# Altium PCB S6_Main.PcbDoc
Units mm, origin at the board's own origin, x right, y up, seen from the top; angles counter-clockwise.
Board outline 75 x 64 mm, 2 copper layers (Top Layer, Bottom Layer); 124 components, 72 nets, 429 pads, 238 vias.
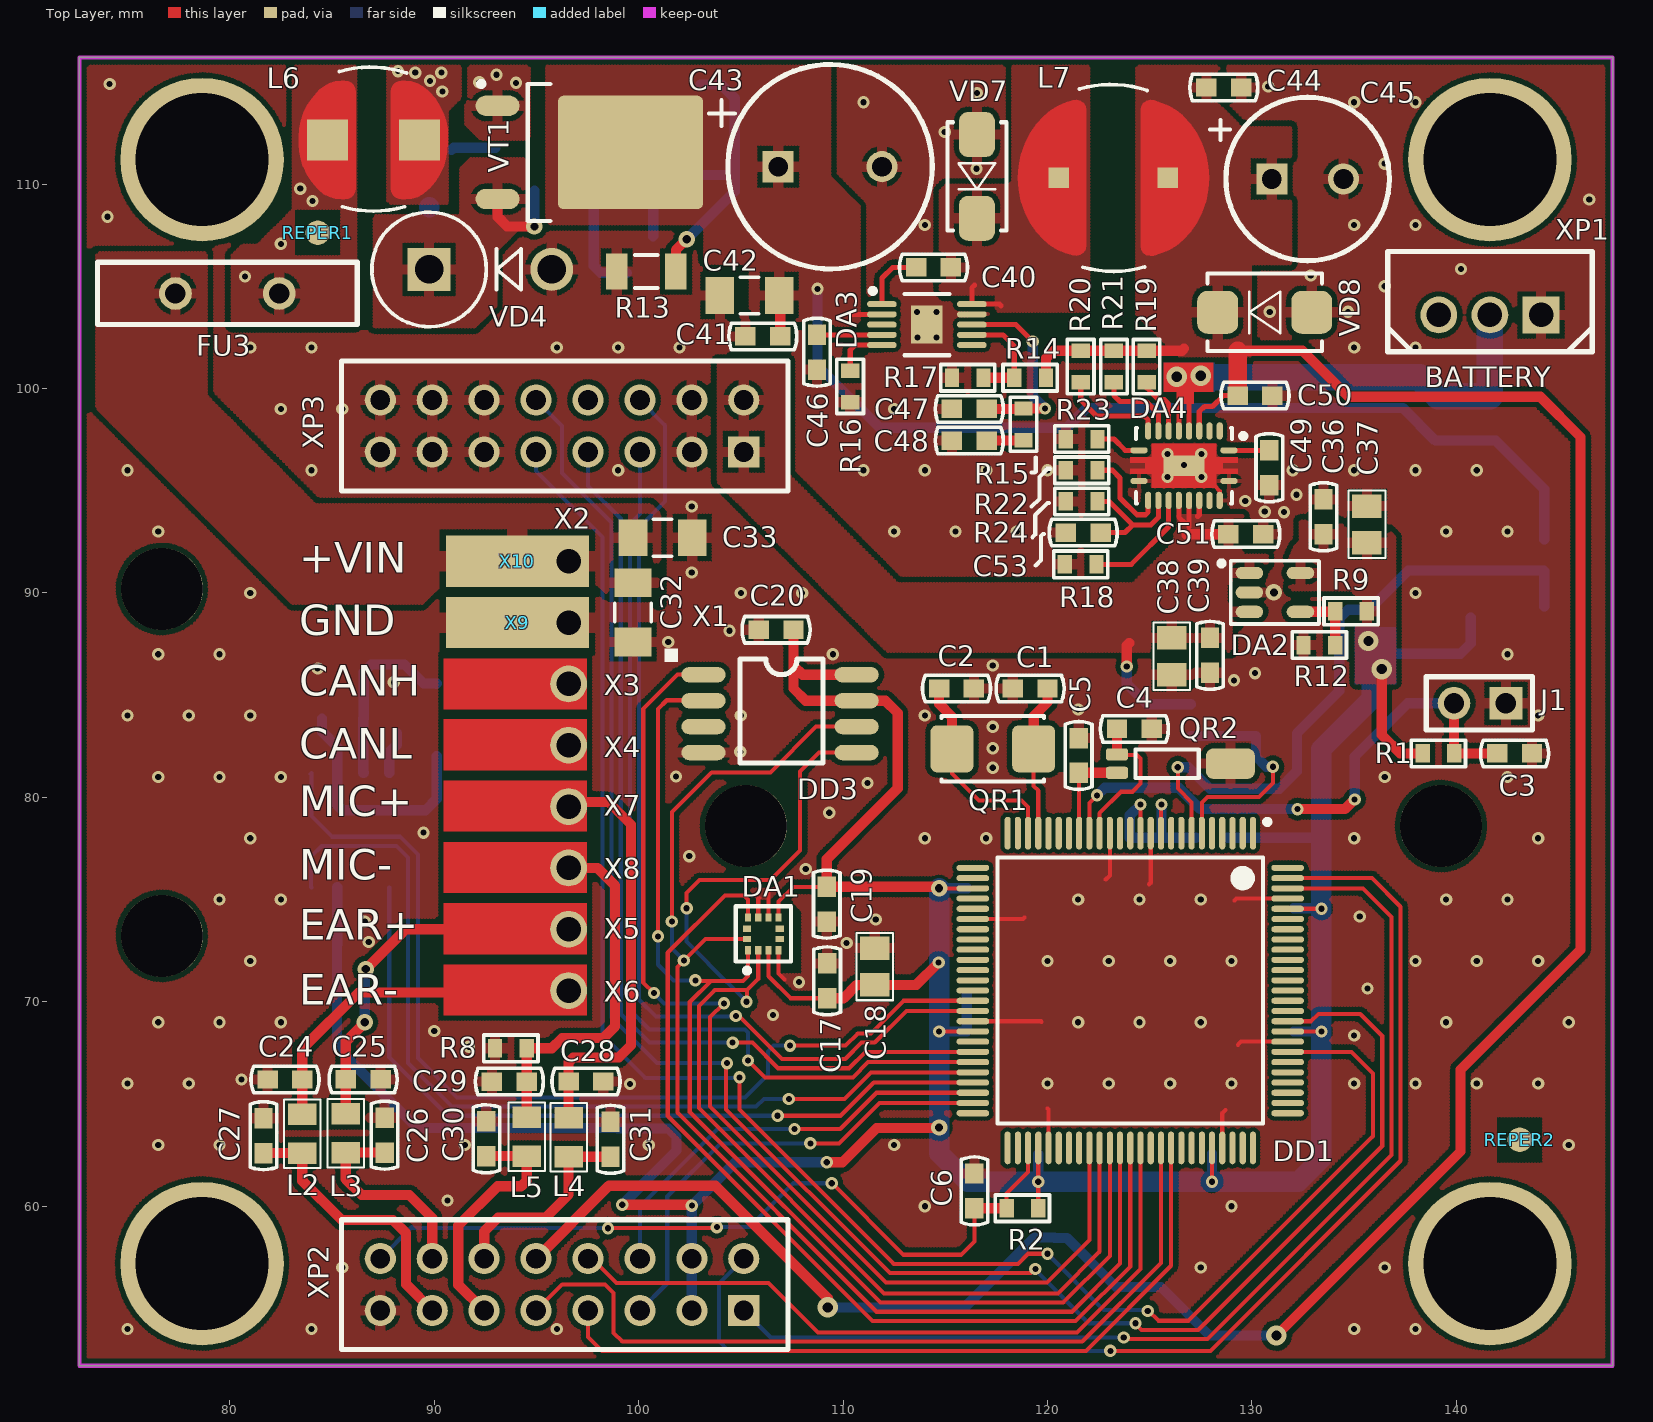
[diagram p0: Top Layer view]
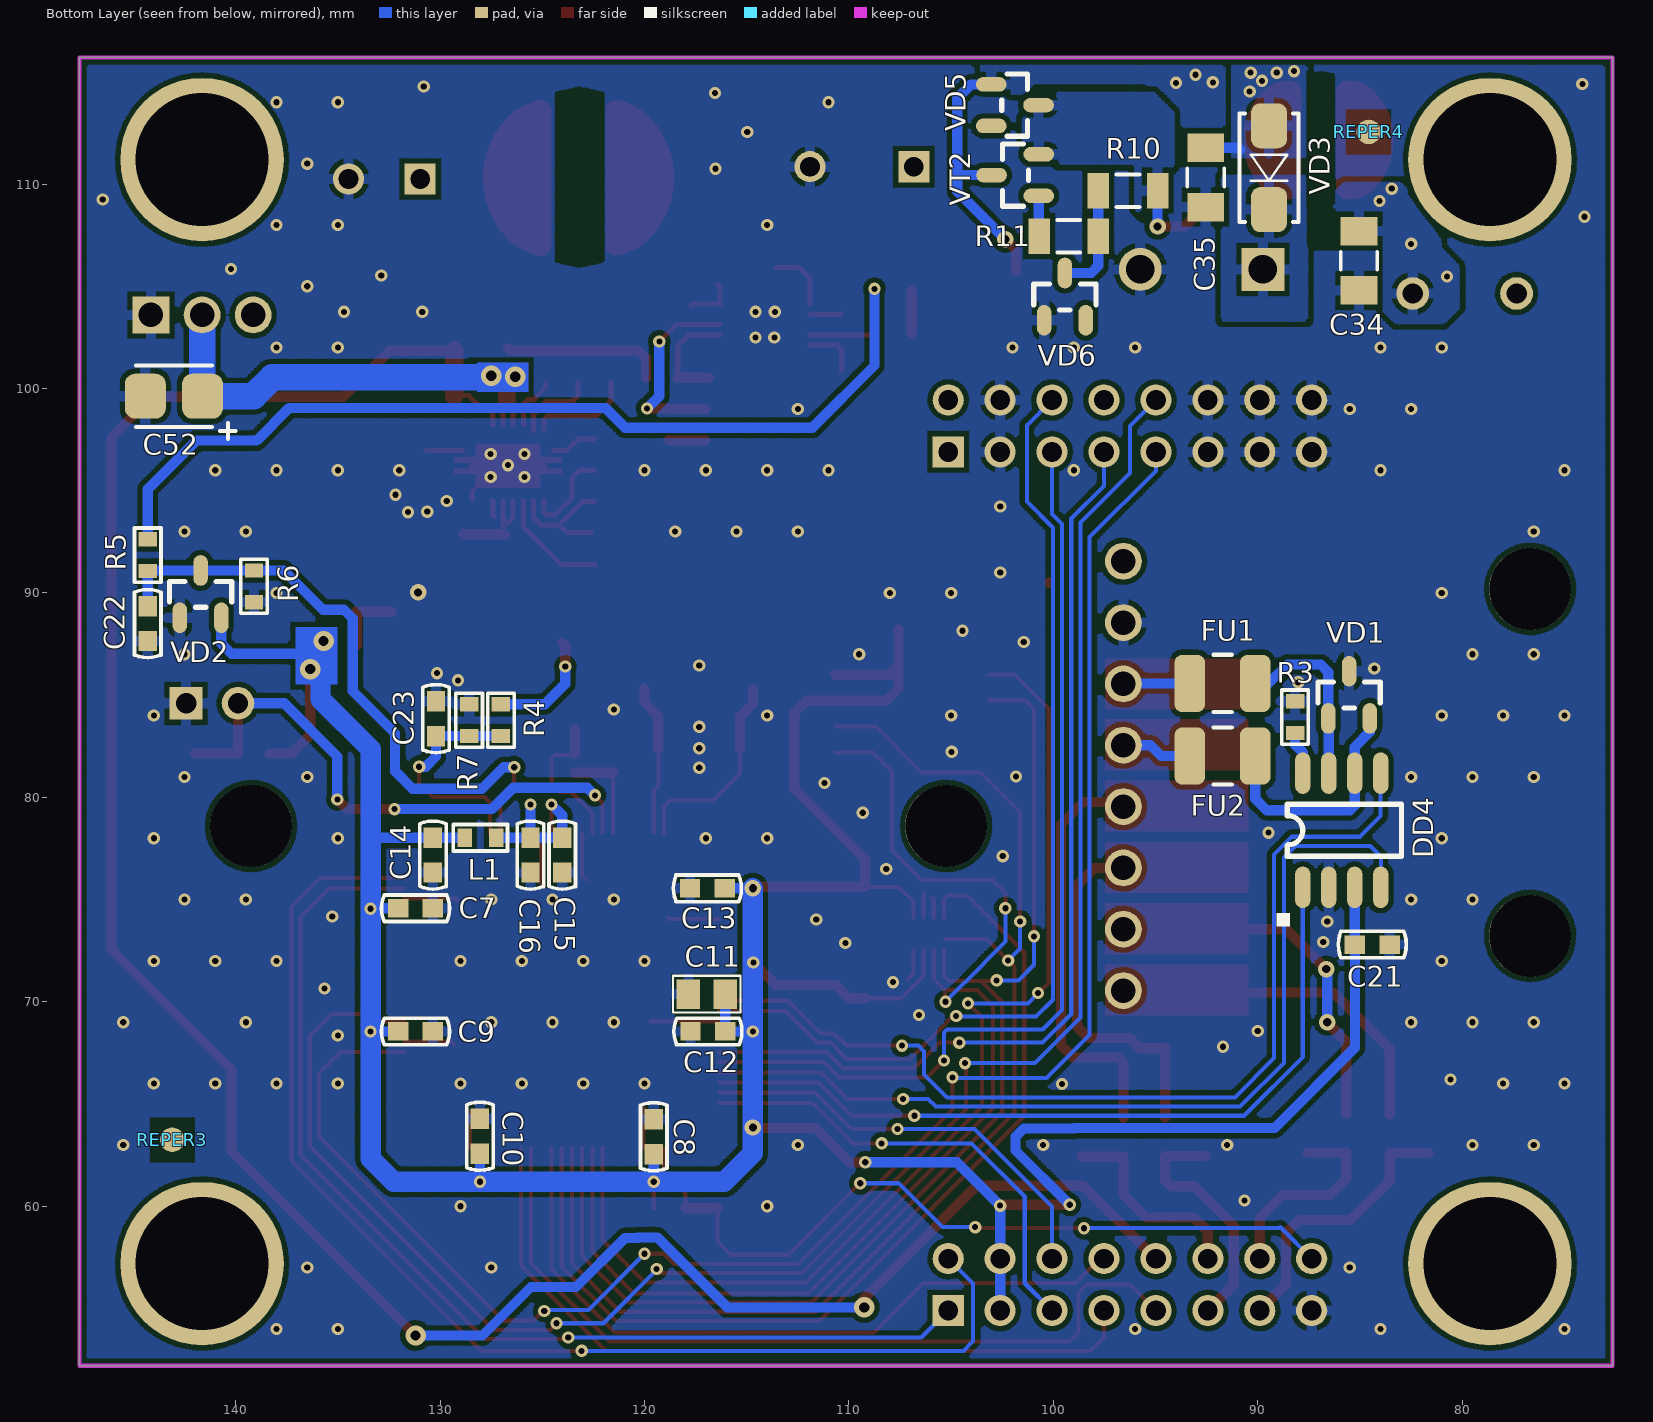
[diagram p1: Bottom Layer view, seen from below]

## Layer stack, top to bottom
Top Solder: solder mask 0.0102, Solder Resist, Dk 3.5
Top Layer: signal copper 0.0356
Dielectric 1: dielectric 0.32, FR-4, Dk 4.8
Bottom Layer: signal copper 0.0356
Bottom Solder: solder mask 0.0102, Solder Resist, Dk 3.5

## Board outline
72.644,52.197 147.644,52.197 147.644,116.197 72.644,116.197

## Design rules (kind name [scope] priority, off if disabled: settings)
Clearance Clearance_1 [InComponent('DD1') OR InComponent('DA4') OR InComponent('DA3') OR InComponent('DA1')] p1: gap=0.2
Clearance [All] p2: gap=0.25
HoleSize [All] p1: absolutevalues=TRUE maxlimit=10 minlimit=0.025 maxpercent=80.000 minpercent=20.000
PolygonConnect PolygonConnect_3 [InComponent('X9') OR InComponent('X10')] p1: connectstyle=Relief reliefconductorwidth=1 reliefentries=4 polygonreliefangle="90 Angle" airgapwidth=0.3
PolygonConnect PolygonConnect_2 [InComponent('DA4') AND IsPad AND PadXSize_AllLayers>0.86] p2: connectstyle=Relief reliefconductorwidth=0.2 reliefentries=4 polygonreliefangle="90 Angle" airgapwidth=0.2
PolygonConnect PolygonConnect_1 [All vs IsVia OR InComponent('L6') OR InComponent('VT1') AND InNet('VIN_F') OR InComponent('DA4') OR InComponent('DA3')] p3: connectstyle=Direct reliefconductorwidth=0.254 reliefentries=4 polygonreliefangle="90 Angle" airgapwidth=0.254
PolygonConnect [All] p4: connectstyle=Relief reliefconductorwidth=0.5 reliefentries=4 polygonreliefangle="90 Angle" airgapwidth=0.25
RoutingVias [All] p1: holewidth=0.4 width=0.8 viastyle="Through Hole" minholewidth=0.3 minwidth=0.6 maxholewidth=0.5 maxwidth=1
SolderMaskExpansion [All] p1: expansion=0.102
Width [All] p1: maxlimit=3 minlimit=0.2 preferedwidth=0.5
29 further rules are at their usual default settings.

## Classes and differential pairs
component class CPU: C1 C2 C3 C4 C5 C6 C7 C8 C9 C10 C11 C12 C13 C14 C15 C16 C17 C18 C19 C20 DA1 DD1 DD3 J1 L1 QR1 QR2 R1 R2 REPER1 REPER2 REPER3 REPER4
component class Interface: C21 C22 C23 C24 C25 C26 C27 C28 C29 C30 C31 DD4 FU1 FU2 L2 L3 L4 L5 R3 R4 R5 R6 R7 R8 VD1 VD2
component class IO: X1 X2 X3 X4 X5 X6 X7 X8 X9 X10 XP2 XP3
component class Power: C32 C33 C34 C35 C36 C37 C38 C39 C40 C41 C42 C43 C44 C45 C46 C47 C48 C49 C50 C51 C52 C53 DA2 DA3 DA4 FU3 L6 L7 R9 R10 R11 R12 R13 R14 R15 R16 R17 R18 R19 R20 R21 R22 R23 R24 VD3 VD4 VD5 VD6 VD7 VD8 VT1 VT2 XP1

## Components (designator, comment, footprint, x,y, rotation, side; value= is the part's Value field where it differs from the comment)
C1 "22pF" CC0603 119.15,85.325 r0 top
C2 "22pF" CC0603 115.55,85.325 r180 top
C3 "220pF" CC0603 142.85,82.15 r180 top
C4 "22pF" CC0603 124.25,83.35 r180 top
C5 "22pF" CC0603 121.525,82.05 r270 top
C6 "220pF" CC0603 116.425,60.75 r270 top
C7 "0.1uF" CC0603 131.2,74.575 r0 bottom
C8 "0.1uF" CC0603 119.55,63.4 r270 bottom
C9 "0.1uF" CC0603 131.2,68.55 r0 bottom
C10 "0.1uF" CC0603 128.05,63.425 r270 bottom
C11 "10uF" CC0805 116.95,70.375 r180 bottom
C12 "0.1uF" CC0603 116.9,68.55 r180 bottom
C13 "0.1uF" CC0603 116.925,75.55 r180 bottom
C14 "0.1uF" CC0603 130.35,77.175 r90 bottom
C15 "0.1uF" CC0603 124.025,77.175 r90 bottom
C16 "0.1uF" CC0603 125.575,77.175 r90 bottom
C17 "0.1uF" CC0603 109.225,71.025 r90 top
C18 "10uF 6.3V" CC0805 111.55,71.725 r270 top
C19 "0.1uF" CC0603 109.2,74.775 r270 top
C20 "0.1uF" CC0603 106.725,88.2 r180 top
C21 "0.1 uF" CC0603 84.4,72.8 r180 bottom
C22 "0.1 uF" CC0603 144.302,88.5 r270 bottom
C23 "0.1 uF" CC0603 130.2,83.85 r90 bottom
C24 "1 nF" CC0603 82.7,66.2 r0 top
C25 "1 nF" CC0603 86.525,66.202 r180 top
C26 "22 pF" CC0603 87.575,63.475 r270 top
C27 "22 pF" CC0603 81.65,63.45 r270 top
C28 "22 pF" CC0603 97.425,66.1 r180 top
C29 "22 pF" CC0603 93.675,66.098 r0 top
C30 "1 nF" CC0603 92.55,63.3 r270 top
C31 "1 nF" CC0603 98.625,63.275 r270 top
C32 "0.1uF" CC1206 99.725,89.05 r90 top
C33 "10nF" CC1206 101.175,92.7 r180 top
C34 "0.1uF" CC1206 85.05,106.25 r90 bottom
C35 "0.1uF" CC1206 92.55,110.325 r90 bottom
C36 "0.1uF" CC0603 133.5,93.725 r90 top
C37 "4.7uF 6.3V" CC0805 135.625,93.35 r270 top
C38 "4.7uF 6.3V" CC0805 126.075,86.9 r90 top
C39 "0.1uF" CC0603 127.95,86.95 r270 top
C40 "0.1 uF" CC0603 114.425,105.925 r0 top
C41 "0.1 uF" CC0603 106.075,102.55 r0 top
C42 "1uF 50V" CC1206 105.425,104.55 r0 top
C43 "220uF x 50V" CC16X10_CAP0.5(1)(Primary) 106.825,110.85 r0 top
C44 "0.1 uF" CC0603 128.625,114.725 r0 top
C45 "1000uFx6.3V" CC8X3.5 130.975,110.25 r0 top
C46 "10 nF" CC0603 108.725,101.775 r90 top
C47 "330pF" CC0603 116.175,99 r0 top
C48 "560 pF" CC0603 116.175,97.45 r0 top
C49 "0.1 uF" CC0603 130.85,96.125 r270 top
C50 "1 uF" CC0603 130.15,99.65 r0 top
C51 "1 uF" CC0603 129.7,92.875 r0 top
C52 "47uF x 6.3V" TAJ-B-1M 141.625,99.625 r0 bottom
C53 "10 nF" CC0603 121.75,92.95 r180 top
DA1 "KX022-1020" LGA-12 106.1,73.325 r90 top
DA2 "AP2210K-ADJTRG1" SOT23-5 131.125,90.025 r0 top
DA3 "TPS54260DGQ" S-PDSO-G10 111.9,104.125 r0 top
DA4 "BQ24070" P-PQFP-N20 126.675,96.225 r180 top
DD1 "LPC1765FBD100" TQFP-100 130.05,78.25 r270 top
DD3 "M25PE16" EIAJ_SO8 103.175,86 r0 top
DD4 "SN65HVD234D" SO-8 87.8,75.6 r180 bottom
FU1 "MICROSMD010F-2" RC1210 91.725,85.575 r0 bottom
FU2 "MICROSMD010F-2" RC1210 91.725,82.025 r0 bottom
FU3 "RXE-110" RXE-110 77.343,104.648 r0 top
J1 "PLS-02" PLS-02 142.425,84.6 r180 top
L1 "10uH" L0603 128.8,78.025 r180 bottom
L2 "BLM21PG221" RC0805 83.55,63.55 r90 top
L3 "BLM21PG221" RC0805 85.675,63.575 r90 top
L4 "BLM21PG221" RC0805 96.575,63.375 r270 top
L5 "BLM21PG221" RC0805 94.525,63.4 r270 top
L6 "47uH" SDR0603 84.775,112.15 r0 top
L7 "15uH" SDR0805 123.225,110.3 r0 top
QR1 "12MHz" AC5032_2 117.325,82.375 r180 top
QR2 "MS3V-T1R" MS3V-T1R 123.4,82.1 r0 top
R1 "10k" RC0603 139.125,82.15 r0 top
R2 "10k" RC0603 118.775,59.9 r180 top
R3 "0" RC0603 88.175,83.925 r90 bottom
R4 "12k 1%" RC0603 127.025,83.775 r90 bottom
R5 "120k" RC0603 144.3,91.85 r90 bottom
R6 "10k" RC0603 139.1,90.325 r270 bottom
R7 "20k 1%" RC0603 128.575,83.775 r270 bottom
R8 "1k" RC0603 93.75,67.725 r0 top
R9 "11k 1%" RC0603 134.85,89.1 r0 top
R10 "220k" RC1206 96.35,109.675 r180 bottom
R11 "220k" RC1206 99.25,107.45 r0 bottom
R12 "16k 1%" RC0603 133.3,87.45 r0 top
R13 "220k" RC1206 100.375,105.725 r180 top
R14 "48.7k 1%" RC0603 119.15,100.525 r0 top
R15 "12k" RC0603 118.825,98.25 r90 top
R16 "240k" RC0603 110.35,100.1 r90 top
R17 "11k 1%" RC0603 116.1,100.525 r0 top
R18 "51k" RC0603 121.625,91.4 r0 top
R19 "100k" RC0603 124.85,101.075 r270 top
R20 "100k" RC0603 121.625,101.075 r270 top
R21 "100k" RC0603 123.25,101.075 r270 top
R22 "10k" RC0603 121.675,96 r0 top
R23 "2k" RC0603 121.675,97.525 r0 top
R24 "36k" RC0603 121.675,94.475 r0 top
REPER1 "REPER1.2" REPER1.2 84.3,107.625 r90 top
REPER2 "REPER1.2" REPER1.2 143.1,63.25 r90 top
REPER3 "REPER1.2" REPER1.2 143.1,63.25 r90 bottom
REPER4 "REPER1.2" REPER1.2 84.575,112.55 r90 bottom
VD1 "PESD2CAN" SOT-23(123) 86.55,83.85 r270 bottom
VD2 "BAT54S" SOT-23(GSD) 142.732,88.775 r180 bottom
VD3 "GS1M" SMA 89.45,110.8 r270 bottom
VD4 "1.5KE150A" DO-201 95.75,105.825 r180 top
VD5 "BZX84C15" SOT-23(123) 103.05,114.875 r0 bottom
VD6 "BZX84C39" SOT-23(123) 100.45,103.325 r270 bottom
VD7 "SK34SMA" SMA 116.55,110.375 r270 top
VD8 "SMBJ5.0A" SMB 130.625,103.725 r0 top
VT1 "FQD5P20TM" D-PAK(TO-252AA) 97.6,111.55 r0 top
VT2 "BC807-40" SOT-23(123) 100.7,109.425 r180 bottom
X1 "PIN_1.2mm" PIN_1.2mm 96.575,88.55 r0 top
X2 "PIN_1.2mm" PIN_1.2mm 96.575,91.55 r0 top
X3 "PIN_1.2mm" PIN_1.2mm 96.575,85.55 r0 top
X4 "PIN_1.2mm" PIN_1.2mm 96.575,82.55 r0 top
X5 "PIN_1.2mm" PIN_1.2mm 96.575,73.55 r0 top
X6 "PIN_1.2mm" PIN_1.2mm 96.575,70.55 r0 top
X7 "PIN_1.2mm" PIN_1.2mm 96.575,79.55 r0 top
X8 "PIN_1.2mm" PIN_1.2mm 96.575,76.55 r0 top
X9 "PIN_2.5x4mm_SMD" PIN_2.5x4mm_SMD 94.069,88.55 r0 top
X10 "PIN_2.5x4mm_SMD" PIN_2.5x4mm_SMD 94.069,91.55 r0 top
XP1 "MW03D" MW03D 144.144,103.597 r180 top
XP2 "PBD-16" PBD16 105.144,54.897 r180 top
XP3 "PBD-16" PBD16 105.144,96.897 r180 top

## Footprints (in the part's own frame and the unit in brackets; to place one, negate y for a bottom-side part, rotate by r counter-clockwise, add the part's x,y. Pads: shape width x height; smd on the part's side, far side on the other; paste and mask are expansions set on the pad)
AC5032_2 [mm]
  rrect30% 2.1x2.3 smd mask+0.06: 1(-2,0) 2(2,0)
  silkscreen extent -2.5,-1.6 2.5,1.6
CC8X3.5 [mil]
  rect 60x60 hole 38 mask+2.36: 1(0,0)
  round 60 hole 38 mask+2.36: 2(137.8,0)
  silkscreen extent -89,-157 226,157
CC16X10_CAP0.5(1)(Primary) [mil]
  round 60 hole 38 mask+2.36: 1(200,0)
  rect 60x60 hole 38 mask+2.36: 2(0,0)
  silkscreen extent -97,-197 297,197
CC0603 [mm]
  rect 1x0.9 smd paste-25.4 mask+0.06: 1(-0.85,0) 2(0.85,0)
  silkscreen extent -1.66,-0.65 1.66,0.65
CC0805 [mm]
  rect 1.15x1.45 smd paste-25.4 mask+0.06: 1(-0.9,0) 2(0.9,0)
  silkscreen extent -1.65,-0.9 1.65,0.9
CC1206 [mm]
  rect 1.4x1.8 smd paste-25.4 mask+0.06: 1(-1.45,0) 2(1.45,0)
  silkscreen extent -0.45,-0.9 0.45,0.9
D-PAK(TO-252AA) [mm]
  oval 2.15x1 smd mask+0.06: 1(-4.5,2.28) 3(-4.5,-2.28)
  rrect10% 7.1x5.55 smd mask+0.06: 2(2,0)
  silkscreen extent -5.42,-3.35 -1.92,3.47
DO-201 [mm]
  round 2.1 hole 1.4 mask+0.06: 1(0,0)
  rect 2.1x2.1 hole 1.4 mask+0.06: 2(6,0)
  silkscreen extent 1.5,-2.8 8.8,2.8
EIAJ_SO8 [mil]
  oval 85x29.53 smd mask+2.36: 1(0,0) 2(0,-50) 3(0,-100) 4(0,-150) 5(295,-150) 6(295,-100) 7(295,-50) 8(295,0)
  silkscreen extent -75,-170 230,50
L0603 [mm]
  rect 0.7x0.9 smd paste-25.4 mask+0.06: 1(0,0) 2(1.549,0)
  silkscreen extent -0.55,-0.65 2.1,0.65
LGA-12 [mm]
  rect 0.4x0.3 smd mask+0.06: 1(-0.8,0.75) 2(-0.8,0.25) 3(-0.8,-0.25) 4(-0.8,-0.75) 7(0.8,-0.75) 8(0.8,-0.25) 9(0.8,0.25) 10(0.8,0.75)
  rect 0.3x0.4 smd mask+0.06: 5(-0.25,-0.8) 6(0.25,-0.8) 11(0.25,0.8) 12(-0.25,0.8)
  silkscreen extent -1.92,-1.35 1.35,1.35
MS3V-T1R [mm]
  rrect50% 1.1x0.6 smd mask+0.06: 1(0,0) 2(0,-0.9)
  rrect50% 2.4x1.5 smd mask+0.06: 3(5.55,-0.45)
  silkscreen extent 0.9,-1.15 4,0.25
MW03D [mm]
  rect 1.8x1.8 hole 1.2 mask+0.06: 1(0,0)
  round 1.8 hole 1.2 mask+0.06: 2(2.5,0) 3(5,0)
  silkscreen extent -2.5,-3.1 7.5,1.8
P-PQFP-N20 [mm]
  oval 0.85x0.3 smd mask+0.06: 1(-2.2,-0.75) 10(2.2,-0.75) 11(2.2,0.75) 20(-2.2,0.75)
  oval 0.3x0.85 smd mask+0.06: 2(-1.75,-1.7) 3(-1.25,-1.7) 4(-0.75,-1.7) 5(-0.25,-1.7) 6(0.25,-1.7) 7(0.75,-1.7) 8(1.25,-1.7) 9(1.75,-1.7) 12(1.75,1.7) 13(1.25,1.7) 14(0.75,1.7) 15(0.25,1.7) 16(-0.25,1.7) 17(-0.75,1.7) 18(-1.25,1.7) 19(-1.75,1.7)
  rect 2x1 smd paste-25.4 mask+0.06: 21(0,0)
  Top Layer region: -1.575,-1.075 1.575,-1.075 1.575,-0.4 2.625,-0.4 2.625,-0.15 1.9,-0.15 1.9,0.15 2.625,0.15 2.625,0.4 1.575,0.4 1.575,1.075 -1.575,1.075 -1.575,0.4 -2.625,0.4 -2.625,0.15 -1.9,0.15 -1.9,-0.15 -2.625,-0.15 -2.625,-0.4 -1.575,-0.4
  silkscreen extent -3.02,-1.85 2.35,1.85
PBD16 [mil]
  rect 60x60 hole 38 mask+2.36: 1(0,0)
  round 60 hole 38 mask+2.36: 2(0,-100) 3(100,0) 4(100,-100) 5(200,0) 6(200,-100) 7(300,0) 8(300,-100) 9(400,0) 10(400,-100) 11(500,0) 12(500,-100) 13(600,0) 14(600,-100) 15(700,0) 16(700,-100)
  silkscreen extent -85,-175 775,75
PIN_1.2mm [mm]
  round 1.8 hole 1.2 mask+0.06: 1(0,0)
PIN_2.5x4mm_SMD [mm]
  rect 7x2.5 smd mask+0.06: 1(0,0)
PLS-02 [mm]
  rect 1.6x1.6 hole 1 mask+0.06: 1(0,0)
  round 1.6 hole 1 mask+0.06: 2(2.54,0)
  silkscreen extent -1.3,-1.3 3.9,1.3
RC0603 [mm]
  rect 0.7x0.9 smd paste-25.4 mask+0.06: 1(-0.775,0) 2(0.774,0)
  silkscreen extent -1.32,-0.65 1.33,0.65
RC0805 [mm]
  rect 1.05x1.4 smd paste-25.4 mask+0.06: 1(-0.95,0) 2(0.95,0)
  silkscreen extent -1.67,-0.89 1.67,0.89
RC1206 [mm]
  rect 1.05x1.75 smd paste-25.4 mask+0.06: 1(-1.45,0) 2(1.45,0)
  silkscreen extent -0.55,-0.8 0.55,0.8
RC1210 [mm]
  rrect50% 1.5x2.8 smd mask+0.06: 1(-1.6,0) 2(1.6,0)
  silkscreen extent -0.45,-1.4 0.45,1.4
REPER1.2 [mm]
  round 1.2 smd paste-25.4 mask+0.06: 1(0,0)
  Top Layer pour cut-out: -1.2,-1.2 1.2,-1.2 1.2,1.2 -1.2,1.2
RXE-110 [mm]
  round 1.6 hole 1 mask+0.06: 1(0,0) 2(5.08,0)
  silkscreen extent -3.81,-1.52 8.89,1.52
S-PDSO-G10 [mm]
  oval 1.45x0.3 smd mask+0.06: 1(0,0) 2(0,-0.5) 3(0,-1) 4(0,-1.5) 5(0,-2) 6(4.4,-2) 7(4.4,-1.5) 8(4.4,-1) 9(4.4,-0.5) 10(4.4,0)
  rect 1.55x1.85 smd mask+0.06: 11(2.2,-1)
  silkscreen extent -0.57,-2.5 3.3,0.77
SDR0603 [mm]
  rect 2x2 smd paste-25.4 mask+0.06: 1(0,0) 2(4.5,0)
  Top Layer region: 0.85,-2.9 1.02,-2.873 1.173,-2.795 1.295,-2.673 1.373,-2.52 1.4,-2.35 1.4,2.35 1.373,2.52 1.295,2.673 1.173,2.795 1.02,2.873 0.85,2.9 0.676,2.9 0.381,2.871 0.098,2.785 -0.163,2.645 -0.392,2.458 -0.502,2.348 -0.775,2.035 -1.002,1.687 -1.18,1.312 -1.181,1.31 -1.302,0.934 -1.375,0.545 -1.4,0.15 -1.4,-0.183 -1.377,-0.556 -1.307,-0.924 -1.193,-1.28 -1.189,-1.288 -1.005,-1.679 -0.768,-2.04 -0.484,-2.366 -0.408,-2.442 -0.171,-2.637 0.099,-2.781 0.393,-2.87 0.698,-2.9
  Top Layer region: 3.65,2.9 3.48,2.873 3.327,2.795 3.205,2.673 3.127,2.52 3.1,2.35 3.1,-2.35 3.127,-2.52 3.205,-2.673 3.327,-2.795 3.48,-2.873 3.65,-2.9 3.824,-2.9 4.119,-2.871 4.402,-2.785 4.663,-2.645 4.892,-2.458 5.002,-2.348 5.275,-2.035 5.502,-1.687 5.68,-1.312 5.681,-1.31 5.802,-0.934 5.875,-0.545 5.9,-0.15 5.9,0.183 5.877,0.556 5.807,0.924 5.693,1.28 5.689,1.288 5.505,1.679 5.268,2.04 4.984,2.366 4.908,2.442 4.671,2.637 4.401,2.781 4.107,2.87 3.802,2.9
  silkscreen extent 0.58,-3.47 3.88,3.57
SDR0805 [mm]
  rect 1x1 smd paste-25.4 mask+0.06: 1(-2.667,0) 2(2.667,0)
  Top Layer region: 1.327,-3.319 1.362,-3.503 1.461,-3.66 1.612,-3.771 1.792,-3.818 1.977,-3.797 2.318,-3.69 2.706,-3.535 3.065,-3.321 3.387,-3.053 3.392,-3.047 3.771,-2.627 4.09,-2.16 4.345,-1.654 4.53,-1.119 4.642,-0.565 4.68,0 4.642,0.565 4.53,1.119 4.345,1.654 4.09,2.16 3.771,2.627 3.392,3.047 3.381,3.059 3.063,3.323 2.709,3.534 2.325,3.688 1.996,3.791 1.806,3.813 1.62,3.764 1.465,3.65 1.363,3.488 1.327,3.299
  Top Layer region: -1.327,3.319 -1.362,3.503 -1.461,3.66 -1.612,3.771 -1.792,3.818 -1.977,3.797 -2.318,3.69 -2.706,3.535 -3.065,3.321 -3.387,3.053 -3.392,3.047 -3.771,2.627 -4.09,2.16 -4.345,1.654 -4.53,1.119 -4.642,0.565 -4.68,0 -4.642,-0.565 -4.53,-1.119 -4.345,-1.654 -4.09,-2.16 -3.771,-2.627 -3.392,-3.047 -3.381,-3.059 -3.063,-3.323 -2.709,-3.534 -2.325,-3.688 -1.996,-3.791 -1.806,-3.813 -1.62,-3.764 -1.465,-3.65 -1.363,-3.488 -1.327,-3.299
  silkscreen extent -1.66,-4.57 1.64,4.57
SMA [mm]
  rrect50% 2.2x1.75 smd mask+0.06: 1(-2.05,0) 2(2.05,0)
  silkscreen extent -2.65,-1.45 2.65,1.45
SMB [mm]
  rrect50% 2x2.1 smd mask+0.06: 1(2.3,0) 2(-2.3,0)
  silkscreen extent -2.8,-1.9 2.8,1.9
SO-8 [mil]
  oval 29.53x80 smd mask+2.36: 1(0,0) 2(50,0) 3(100,0) 4(150,0) 5(150,220) 6(100,220) 7(50,220) 8(0,220)
  silkscreen extent -50,-75 190,160
SOT23-5 [mm]
  oval 1.35x0.6 smd mask+0.06: 1(-1.25,0.95) 2(-1.25,0) 3(-1.25,-0.95) 4(1.25,-0.95) 5(1.25,0.95)
  silkscreen extent -2.74,-1.55 2.16,1.55
SOT-23(123) [mil]
  oval 59.06x28.07 smd mask+2.36: 1(-0.5,0) 2(-0.5,80) 3(-91.5,40)
  silkscreen extent -70,-20 -20,100
SOT-23(GSD) [mil]
  oval 28.07x59.06 smd mask+2.36: 1(0,0.5) 2(80,0.5) 3(40,91.5)
  silkscreen extent -20,20 100,70
TAJ-B-1M [mm]
  rrect50% 2x2.2 smd mask+0.06: 1(0,0) 2(2.794,0)
  silkscreen extent -1.63,-1.5 3.25,2.08
TQFP-100 [mm]
  oval 1.6x0.3 smd mask+0.06: 1(0,0) 2(0,-0.5) 3(0,-1) 4(0,-1.5) 5(0,-2) 6(0,-2.5) 7(0,-3) 8(0,-3.5) 9(0,-4) 10(0,-4.5) 11(0,-5) 12(0,-5.5) 13(0,-6) 14(0,-6.5) 15(0,-7) 16(0,-7.5) 17(0,-8) 18(0,-8.5) 19(0,-9) 20(0,-9.5) 21(0,-10) 22(0,-10.5) 23(0,-11) 24(0,-11.5) 25(0,-12) 51(15.4,-12) 52(15.4,-11.5) 53(15.4,-11) 54(15.4,-10.5) 55(15.4,-10) 56(15.4,-9.5) 57(15.4,-9) 58(15.4,-8.5) 59(15.4,-8) 60(15.4,-7.5) 61(15.4,-7) 62(15.4,-6.5) 63(15.4,-6) 64(15.4,-5.5) 65(15.4,-5) 66(15.4,-4.5) 67(15.4,-4) 68(15.4,-3.5) 69(15.4,-3) 70(15.4,-2.5) 71(15.4,-2) 72(15.4,-1.5) 73(15.4,-1) 74(15.4,-0.5) 75(15.4,0)
  oval 0.3x1.6 smd mask+0.06: 26(1.7,-13.7) 27(2.2,-13.7) 28(2.7,-13.7) 29(3.2,-13.7) 30(3.7,-13.7) 31(4.2,-13.7) 32(4.7,-13.7) 33(5.2,-13.7) 34(5.7,-13.7) 35(6.2,-13.7) 36(6.7,-13.7) 37(7.2,-13.7) 38(7.7,-13.7) 39(8.2,-13.7) 40(8.7,-13.7) 41(9.2,-13.7) 42(9.7,-13.7) 43(10.2,-13.7) 44(10.7,-13.7) 45(11.2,-13.7) 46(11.7,-13.7) 47(12.2,-13.7) 48(12.7,-13.7) 49(13.2,-13.7) 50(13.7,-13.7) 76(13.7,1.7) 77(13.2,1.7) 78(12.7,1.7) 79(12.2,1.7) 80(11.7,1.7) 81(11.2,1.7) 82(10.7,1.7) 83(10.2,1.7) 84(9.7,1.7) 85(9.2,1.7) 86(8.7,1.7) 87(8.2,1.7) 88(7.7,1.7) 89(7.2,1.7) 90(6.7,1.7) 91(6.2,1.7) 92(5.7,1.7) 93(5.2,1.7) 94(4.7,1.7) 95(4.2,1.7) 96(3.7,1.7) 97(3.2,1.7) 98(2.7,1.7) 99(2.2,1.7) 100(1.7,1.7)
  silkscreen extent -0.67,-12.5 14.2,0.82

## Part data
C1 C2 C3 C4 C5 C6 C7 C8 C9 C10 C12 C13 C14 C15 C16 C17 C19 C20 C21 C22 C23 C24 C25 C26 C27 C28 C29 C30 C31 C36 C39 C40 C41 C44 C46 C47 C48 C49 C50 C51 C53: library part CC0603, "CC0603"
C11 C18 C37 C38: library part CC0805, "CC0805"
C32 C33 C34 C35 C42: library part CC1206, "CC1206"
C43: library part CAP0.5(1), "CAP0.5(1)"
C45: library part CAP0.35, "CAP0.35"
C52: library part TAJ-B, "TAJ-B"
DA2: library part MCP1824T-ADJE/OT, "300 mA, Low Voltage, Low Quiescent Current LDO Regulator, 5-Pin SOT-223, Extended Temperature, Tape and Reel"
DD1: library part LPC1768FBD100, "Cortex -M3 32-Bit Microcontroller, 512KB Flash, 64KB RAM, 100-Lead LQFP"
DD3: library part S25FL016A0LMFI01, "S25FL016A0LMFI01"
DD4: "CAN Transceiver"
FU1 FU2: library part MICROSMD, "MICROSMD"
L1: library part L0603, "L0603"
L6: library part SDR0603, "SDR0603"
L7: library part SDR0805, "SDR0805"
QR1: library part AC5032_2, "AC5032/2"
QR2: "CRYSTAL_32768 Hz"
R1 R2 R3 R4 R5 R6 R7 R8 R9 R12 R14 R15 R16 R17 R18 R19 R20 R21 R22 R23 R24: library part RC0603, "RC0603"
R10 R11 R13: library part RC1206, "RC1206"
VD1: "TVS for CAN"
VD2: "1.0 Ampere General Purpose Rectifier"
VD4: library part 1.5KE, "1.5KE"
VD5 VD6: library part BZX84, "Zener Voltage Regulator Diode"
VD7: "Schottky Rectifier"
VD8: library part SMBJ, "SMBJ"
VT1: library part IRFR9220, "HEXFET Power MOSFET"
VT2: library part BC857B, "BC857B"

## Free pads (board coordinates)
  round 4 hole 4 unplated mask+0.06: 0(76.675,73.225) 0(76.675,90.197) 0(105.244,78.597) 0(139.244,78.597)
  round 8 hole 6.5 unplated mask+0.06: 0(78.644,57.197) 0(78.644,111.197) 0(141.644,57.197) 0(141.644,111.197)

## Via types
v1: diameter 0.6, hole 0.3, Top Layer to Bottom Layer, 225 vias
v2: diameter 0.8, hole 0.4, Top Layer to Bottom Layer, 7 vias
v3: diameter 1, hole 0.5, Top Layer to Bottom Layer, 6 vias

## Nets (pads, with @x,y where several pads share a name; then routed paths per layer and width w, separated by ;. In a path a pad name is that pad's centre, name@x,y a point inside that pad or via, vN(x,y) a via of type N, cw(c..) or ccw(c..) an arc to the next point about the centre after c; other vN are vias at no path point)
+3V: C7.2 C8.2 C9.2 C10.2 C11.2 C12.2 C13.2 C14.2 C17.1 C18.2 C19.1 C20.1 C21.1 C36.1 C37.2 DA1.3 DA1.7 DA2.5 DD1.28 DD1.42 DD1.54 DD1.71 DD1.84 DD1.96 DD3.7 DD3.8 DD4.3 L1.1 R1.1 R2.1 R9.2 VD2.2 XP2.3 XP2.4 | length 189
  Top Layer w0.2: DA1.3 106.35,71.25 107.425,70.175 C17.1 ; DA1.7 106.85,74.9 107.575,75.625 C19.1 ; v1(114.7,68.55) DD1.42 ; v2(114.7,75.55) DD1.28 ; R2.1 v1(119.55,61.2) DD1.54 ; v1(128.05,61.2) DD1.71 ; DD1.84 v1(133.4,68.55) ; DD1.96 v1(133.4,74.55)
  Top Layer w0.5: v1(99.2,60.075) 102.558,60.075 v1(102.604,60.029) ; C20.1 107.575,86.45 ; v1(109.2,62.15) 109.975,62.15 111.65,63.825 114.725,63.825 v2(114.7,63.85) ; C17.1 110.025,70.175 110.675,70.825 C18.2 113.575,70.825 v1(114.675,71.925) ; DD3.8 108.025,86 107.575,86.45 ; v2(114.7,75.55) 114.625,75.625 C19.1 109.2,76.975 112.675,80.45 112.675,84.125 112.07,84.73 DD3.7 108.17,84.73 107.575,85.325 107.575,86.45 ; v3(136.35,86.275) 136.35,83.05 137.25,82.15 R1.1
  Bottom Layer w0.5: C21.1 85.25,67.75 89.175,63.825 98.95,63.825 98.975,63.8 101.45,63.8 101.85,63.4 101.85,62.725 v1(99.2,60.075) ; C21.1@85.26,72.8 DD4.3 ; XP2.3 XP2.4 v1(102.604,60.029) 104.725,62.15 v1(109.2,62.15) ; v1(114.7,68.55) C12.2 C11.2 ; 114.7,70.4 114.725,70.375 ; v2(114.7,75.55) C13.2 ; v1(119.55,61.2) C8.2 ; v1(128.05,61.2) C10.2 ; L1.1 C14.2 133.35,78.025 133.4,77.975 ; C9.2 v1(133.4,68.55) ; C7.2 133.375,74.575 v1(133.4,74.55) ; 136.85,87.025 140.2,87.025 140.7,87.525 VD2.2
  Bottom Layer w1: v2(114.7,75.55) 114.7,70.4 v1(114.7,68.55) 114.7,62.6 116.1,61.2 v1(119.55,61.2) v1(128.05,61.2) 132.275,61.2 133.4,62.325 v1(133.4,68.55) v1(133.4,74.55) 133.4,77.975 133.4,82.35 135.85,84.8 135.85,86.275 135.725,86.4
  other v3: 135.7,87.65
CAN_D: DD1.47 DD4.1 | length 38.7
  Top Layer w0.2: v1(106.8,64.425) 109.877,64.425 111.502,66.05 DD1.47
  Bottom Layer w0.2: DD4.1 87.8,67.3 90.675,64.425 v1(106.8,64.425)
CAN_EN: DD1.39 DD4.5 | length 48.8
  Top Layer w0.2: v1@107.405,67.73 v1(107.405,67.853) 110.124,67.853 110.72,68.45 111.364,68.45 112.964,70.05 113.15,70.05 DD1.39
  Bottom Layer w0.2: DD4.5@83.95,81.148 DD4.5 83.99,79.085 85,78.075 88.336,78.075 89.2,77.211 89.2,67.25 91.125,65.325 105.2,65.325 106.325,66.45 106.325,67.575 106.603,67.853 v1(107.405,67.853)
CAN_R: DD1.46 DD4.4 | length 46
  Top Layer w0.2: v1(107.35,65.25) 110.066,65.25 111.366,66.55 113.05,66.55 DD1.46
  Bottom Layer w0.2: DD4.4 83.975,75.615 83.975,77.1 84.5,77.625 88.15,77.625 88.725,77.05 88.725,67.011 90.861,64.875 105.75,64.875 106.125,65.25 v1(107.35,65.25)
CANH: FU1.2 X3.1 | length 3.4
  Bottom Layer w0.5: FU1.2@93.403,85.497 FU1.2 96.55,85.575 X3.1
CANL: FU2.2 X4.1 | length 3.5
  Bottom Layer w0.5: FU2.2 94.725,82.025 95.25,82.55 X4.1
EAR_HF+: C26.2 L3.1 XP2.14 | length 10.2
  Top Layer w0.5: C26.2 L3.1 85.675,61.325 86.45,60.55 88.775,60.55 89.904,59.421 XP2.14
EAR_HF-: C27.2 L2.1 XP2.13 | length 13.7
  Top Layer w0.5: C27.2 L2.1 83.55,61.25 85.475,59.325 87.975,59.325 88.626,58.674 88.626,56.175 XP2.13
GND: C1.1 C2.1 C3.1 C4.1 C5.1 C6.1 C7.1 C8.1 C9.1 C10.1 C11.1 C12.1 C13.1 C14.1 C15.1 C16.1 C17.2 C18.1 C19.2 C20.2 C21.2 C22.2 C23.2 C24.1 C25.1 C26.1 C27.1 C28.1 C29.1 C30.1 C31.1 C32.1 C33.1 C34.1 C35.1 C36.2 C37.1 C38.1 C39.2 C41.1 C42.1 C43.1 C44.2 C45.2 C46.1 C47.1 C48.1 C49.2 C50.2 C51.2 C52.2 C53.2 DA1.4 DA1.8 DA1.9 DA2.2 DA3.9 DA3.11 DA4.11 DA4.19 DA4.20 DA4.21 DD1.11 DD1.15 DD1.31 DD1.41 DD1.55 DD1.72 DD1.83 DD1.97 DD3.4 DD4.2 J1.1 QR2.3 R3.2 R6.2 R7.1 R8.1 R12.1 R13.2 R16.1 R17.1 R18.1 R22.1 R23.1 R24.1 VD1.3 VD2.1 VD4.1 VD6.1 VD7.1 VD8.1 X1.1 X9.1 XP1.1 XP2.15 XP3.3 XP3.4 XP3.11 XP3.12 XP3.13 XP3.14 XP3.15 XP3.16 | length 24.3
  Top Layer w0.2: DA1.9 105.85,75.025 105.9,75.075 ; DA1.8 106.35,75.287 ; DA1.4 106.85,71.386 107.137,71.1 ; DD1.41 119.675,69.05 119.7,69.025 ; DD1.31 118.8,74.05 118.875,74.125 ; 120,64.775 120.05,64.725 DD1.55 ; 122.85,75.975 123.05,76.175 DD1.15 ; 124.975,75.75 125.05,75.825 DD1.11 ; 128.187,95.221 128.425,94.984 DA4.19 ; DD1.72 128.55,64.55 128.7,64.7 ; 129.15,74.95 129.25,75.05 DD1.97 ; 129.325,67.9 129.475,68.05 DD1.83
  other v1: 75,54 84,54 96,54 135,54 138,54 85.5,57 127.5,57 136.5,57 114,60 129,60 90.65,60.275 76.5,63 79.5,63 91.5,63 100.5,63 112.5,63 145.5,63 99.575,65.975 75,66 78,66 120,66 123,66 126,66 129,66 135,66 138,66 141,66 144,66 80.575,66.2 91.7,67.8 135,68.35 90,68.575 76.5,69 79.5,69 82.5,69 121.5,69 124.5,69 127.5,69 139.5,69 145.5,69 106.575,69.35 135.65,70.65 107.85,70.962 81,72 120,72 123,72 126,72 129,72 138,72 141,72 144,72 110.175,72.875 86.8,72.925 86.6,73.925 111.6,74.025 135.275,74.175 79.5,75 82.5,75 121.5,75 124.5,75 127.5,75 139.5,75 142.5,75 108.175,76.5 102.475,77.125 81,78 114,78 117,78 135,78 144,78 89.475,78.275 109.325,79.25 111.2,80.7 76.5,81 79.5,81 82.5,81 136.5,81 142.5,81 101.825,81.025 117.325,81.45 104.975,82.225 117.325,82.4 117.325,83.45 75,84 78,84 81,84 105,84 114,84 144,84 121.5,84.3 88.025,85.625 129.125,85.725 130.15,86.075 84.3,86.3 117.325,86.45 76.5,87 79.5,87 109.5,87 142.5,87 101.45,87.6 104.45,88.15 81,90 105,90 108,90 138,90 102.6,91 76.5,93 112.5,93 115.5,93 118.5,93 139.5,93 142.5,93 131.575,93.95 130.625,93.975 102.6,94.225 129.675,94.5 132.179,94.8 125.875,95.675 127.525,95.675 75,96 84,96 99,96 111,96 114,96 117,96 120,96 132,96 135,96 138,96 141,96 126.675,96.25 125.875,96.8 127.525,96.8 82.5,99 85.5,99 112.5,99 81,102 84,102 96,102 99,102 102,102 135,102 138,102 113.65,102.5 114.575,102.5 113.625,103.75 114.575,103.75 130.875,103.75 134.7,103.75 136.5,105 132.875,105.525 140.225,105.85 114,108 135,108 138,108 74.025,108.4 146.5,109.25 116.525,110.75 136.5,111 114.975,112.55 111,114 135,114 138,114 116.55,114.45 130.8,114.775 74.125,114.9
  other v2: 131.075,90.025
GPS_ON: DD1.67 XP2.7 | length 37.6
  Top Layer w0.2: XP2.7 97.524,53.601 98.2,52.925 121.886,52.925 126.05,57.089 DD1.67
GPS_RST: DD1.64 XP2.8 | length 35.7
  Top Layer w0.2: XP2.8 97.724,57.437 98.911,56.25 106.35,56.25 108.775,53.825 121.45,53.825 124.55,56.925 DD1.64
GPS_RX: DD1.48 XP2.6 | length 21.1
  Top Layer w0.2: v1(107.625,63.775) 109.864,63.775 111.639,65.55 DD1.48
  Bottom Layer w0.2: XP2.6 100.064,59.989 103.85,63.775 v1(107.625,63.775)
GPS_TX: DD1.49 XP2.5 | length 23
  Top Layer w0.2: v1(108.4,63.075) 109.8,63.075 111.775,65.05 DD1.49
  Bottom Layer w0.2: XP2.5 101.4,56.233 101.4,60.475 104,63.075 v1(108.4,63.075)
GSM_ON: DD1.45 XP3.5 | length 46.8
  Top Layer w0.2: v1(105.35,67.125) 106.175,66.3 110.479,66.3 111.229,67.05 DD1.45
  Bottom Layer w0.2: XP3.5 100.064,93.864 99.575,93.375 99.575,69.598 100.519,68.653 105.197,68.653 105.35,68.5 v1(105.35,67.125)
H+: C25.2 L3.2 X5.1 | length 13.2
  Top Layer w0.5: L3.2 C25.2 85.675,68.05 86.6,68.975 v2(86.6,69) ; v2(86.65,71.6) 88.6,73.55 91.525,73.55
  Bottom Layer w0.5: v2(86.6,69) 86.6,71.55 v2(86.65,71.6)
H-: C24.2 L2.2 X6.1 | length 13.1
  Top Layer w0.5: L2.2 C24.2 83.55,67.7 86.3,70.45 92.325,70.45
M+: C28.2 L4.1 X7.1 | length 20.5
  Top Layer w0.5: X7.1@96.5,79.775 98.525,79.775 99.625,78.675 99.625,67.875 99.025,67.275 96.8,67.275 96.575,67.05 C28.2 L4.1
M-: C29.2 L5.1 R8.2 X8.1 | length 17.7
  Top Layer w0.5: L5.1 C29.2 ; C29.2@94.524,66.098 R8.2 95.75,67.725 96.25,68.225 98.275,68.225 98.85,68.8 98.85,75.675 97.975,76.55 X8.1
MIC_HF+: C31.2 L4.2 XP2.12 | length 10.1
  Top Layer w0.5: XP2.12 92.444,58.769 93.125,59.45 95.45,59.45 96.575,60.575 L4.2 C31.2
MIC_HF-: C30.2 L5.2 XP2.11 | length 12.1
  Top Layer w0.5: XP2.11 91.182,56.159 91.182,59.057 93.1,60.975 94.25,60.975 94.525,61.25 L5.2 C30.2
MISO: DA1.1 DD1.61 DD3.2 | length 58.5
  Top Layer w0.2: v1(100.95,73.2) 100.95,84.325 101.375,84.75 103.155,84.75 DD3.2 ; v1(102.775,71.05) 102.8,71.025 103.539,71.025 ; DA1.1 105.35,71.261 105.114,71.025 103.539,71.025 ; DD1.61 123.05,57.568 120.77,55.288 111.823,55.288 102.5,64.61 102.5,69.986 103.539,71.025
  Bottom Layer w0.2: v1(100.95,73.2) 100.95,71.811 101.711,71.05 v1(102.775,71.05)
MOSI: DA1.2 DD1.60 DD3.5 | length 59.7
  Top Layer w0.2: v1(102.35,74.575) 102.35,75.325 102.975,75.95 106.45,75.95 107.9,77.4 107.9,81.275 108.815,82.19 DD3.5 ; v1(105.28,70.003) 105.3,70.023 105.3,70.575 ; DA1.2 105.85,71.125 105.3,70.575 ; DD1.60 122.55,57.775 120.512,55.738 112.009,55.738 102.95,64.797 102.95,69.8 103.725,70.575 105.3,70.575
  Bottom Layer w0.2: v1(102.35,74.575) 102.35,72.946 103.425,71.871 103.425,71.859 v1(105.28,70.003)
NetC1_2: C1.2 DD1.22 QR1.1 | length 7.4
  Top Layer w0.2: QR1.1 119.325,80.55 119.55,80.325 DD1.22
  Top Layer w0.5: QR1.1 119.325,83.975 120,84.65 C1.2
NetC2_2: C2.2 DD1.23 QR1.2 | length 10.1
  Top Layer w0.2: QR1.2 115.325,81.175 116.65,79.85 118.725,79.85 119.05,79.525 DD1.23
  Top Layer w0.5: C2.2 114.7,84.575 115.325,83.95 QR1.2
NetC3_2: C3.2 DD1.17 J1.2 R1.2 | length 28
  Top Layer w0.2: DD1.17 122.05,79.725 v1(122.425,80.1)
  Top Layer w0.5: v1(132.225,79.425) 134.55,79.425 v1(135.025,79.9) ; J1.2 139.885,82.164 R1.2 C3.2
  Bottom Layer w0.5: v1(122.425,80.1) 122.8,80.475 126.425,80.475 127.475,79.425 v1(132.225,79.425) ; v1(135.025,79.9) 135.025,82 137.625,84.6 J1.2
NetC4_2: C4.2 DD1.16 QR2.1 | length 7.3
  Top Layer w0.2: DD1.16 122.55,79.225 123.6,80.275 124.15,80.275 124.55,80.675 124.55,81.9 124.375,82.075 123.425,82.075 QR2.1
  Top Layer w0.5: QR2.1 C4.2
NetC5_2: C5.2 DD1.18 QR2.2 | length 4.8
  Top Layer w0.2: C5.2 121.55,81.175 DD1.18
  Top Layer w0.5: C5.2 QR2.2
NetC6_2: C6.2 DD1.53 R2.2 XP2.16 | length 38.9
  Top Layer w0.2: v1(98.5,58.925) 103.775,58.925 v1(103.825,58.975) ; v1(109.45,61.125) 112.95,57.625 115.775,57.625 116.425,58.275 C6.2 ; R2.2 118.001,60.626 119.05,61.675 DD1.53
  Top Layer w0.5: C6.2 R2.2
  Bottom Layer w0.2: XP2.16 88.902,58.975 88.952,58.925 v1(98.5,58.925) ; v1(103.825,58.975) 105.425,58.975 107.575,61.125 v1(109.45,61.125)
NetC15_2: C15.2 C16.2 DD1.10 DD1.12 L1.2 | length 9.6
  Top Layer w0.2: DD1.12 124.55,79.525 124.6,79.575 124.55,79.625 v1(124.55,79.65) ; DD1.10 v1@125.55,79.75
  Bottom Layer w0.5: v1(124.55,79.65) 124.025,79.125 C15.2 C16.2 ; v1(125.575,79.65) C16.2 ; L1.2 C16.2
NetC34_2: C34.2 FU3.2 L6.1
  other v1: 80.75,105.475 82.5,107.075 84.05,109.175 83.45,109.775
NetC35_2: C35.2 L6.2 VD3.1 | length 2.2
  Bottom Layer w0.5: 90.85,111.675 90.95,111.775 C35.2@93,111.775
  other v1: 90.4,114.525 89.8,115.05 89.075,115.45 90.35,115.45 88.225,115.525
NetC40_1: C40.1 DA3.1 | length 3.2
  Top Layer w0.25: DA3.1 111.9,105.4 112.425,105.925 C40.1
NetC40_2: C40.2 DA3.10 L7.1 VD7.2 | length 2.4
  Top Layer w0.25: 116.425,105.05 116.3,104.925 DA3.10 117.65,104.125 117.725,104.05
NetC46_2: C46.2 DA3.4 | length 3.2
  Top Layer w0.25: C46.2 DA3.4
NetC47_2: C47.2 DA3.8 R15.2 | length 9.8
  Top Layer w0.25: DA3.8 118.45,103.125 v1@119.325,102.25
  Top Layer w0.5: C47.2 118.801,99 R15.2 v1(119.875,99.025)
  Bottom Layer w0.5: v1(119.275,102.3) 119.275,99.625 v1(119.875,99.025)
NetC48_2: C48.2 R15.1 | length 1.8
  Top Layer w0.5: C48.2 118.8,97.45 R15.1
NetC49_1: C49.1 DA4.1 | length 1.8
  Top Layer w0.25: DA4.1 130.699,96.975 C49.1@130.7,96.976
NetC52_1: C52.1 DA4.5 DA4.6 XP1.2 | length 20.4
  Top Layer w0.25: DA4.6@126.425,98.225 126.425,99.5 ; 126.9,99.475 126.925,99.45 DA4.5@126.925,98.225
  Bottom Layer w1.3: 128.1,100.55 138.2,100.55 139.125,99.625 C52.1 141.644,99.644 XP1.2
  other v3: 126.325,100.575 127.5,100.625
NetC53_1: C53.1 DA4.13 R24.2 | length 6.2
  Top Layer w0.25: R24.2@122.45,94.475 123.018,94.475 124.168,93.325 ; C53.1 123.793,92.95 124.168,93.325 ; DA4.13 125.425,93.7 125.05,93.325 124.168,93.325
NetDA2_4: DA2.4 R9.1 R12.2 | length 3.4
  Top Layer w0.5: DA2.4 134.05,89.075 R9.1 R12.2
NetDA3_5: DA3.5 R16.2 | length 2.7
  Top Layer w0.25: R16.2 110.35,101.875 110.6,102.125 DA3.5
NetDA3_7: DA3.7 R14.1 R17.2 | length 5.4
  Top Layer w0.25: DA3.7 117.825,102.625 118.375,102.075 R14.1
  Top Layer w0.5: R17.2 R14.1
NetDA4_7: DA4.7 R19.2 | length 2.7
  Top Layer w0.25: R19.2 124.85,100.032 125.432,99.45 125.725,99.45 125.925,99.25 DA4.7@125.925,98.225
NetDA4_8: DA4.8 R21.2 | length 4
  Top Layer w0.25: R21.2 123.25,99.65 123.541,99.359 124.816,99.359 125.425,98.75 DA4.8
NetDA4_9: DA4.9 R20.2 | length 5.1
  Top Layer w0.25: R20.2 121.625,99.425 122.4,98.65 124.75,98.65 124.925,98.475 DA4.9
NetDA4_10: DA4.10 R23.2 | length 2.3
  Top Layer w0.25: R23.2@122.45,97.525 123.25,97.525 123.8,96.975 DA4.10
NetDA4_12: DA4.12 R22.2 | length 4.6
  Top Layer w0.25: R22.2@122.45,96 123.175,96 123.55,95.625 123.55,94.65 124.375,93.825 124.8,93.825 124.925,93.95 DA4.12
NetDA4_14: DA4.14 R18.2 | length 5.6
  Top Layer w0.25: R18.2 124.1,91.4 125.925,93.225 DA4.14
NetDD4_6: DD4.6 FU2.1 VD1.2 | length 11.8
  Bottom Layer w0.5: VD1.2 84.518,83.207 85.26,82.465 DD4.6 85.26,79.615 85.5,79.375 89.575,79.375 90.125,79.925 FU2.1
NetDD4_7: DD4.7 FU1.1 VD1.1 | length 9.1
  Bottom Layer w0.5: DD4.7@86.55,81.208 DD4.7 86.53,83.843 VD1.1 86.55,86.125 86.925,86.5 88.55,86.5 89.475,85.575 FU1.1 FU1.1@90.1,85.55
NetDD4_8: DD4.8 R3.1 | length 2.1
  Bottom Layer w0.5: DD4.8 87.8,82.2 88.175,82.575 R3.1
NetR10_1: R10.1 R11.1 VD6.3 | length 5.5
  Bottom Layer w0.5: R10.1 R11.1 97.8,106 98.151,105.649 VD6.3
NetR10_2: R10.2 VD3.2 VD4.2 VD5.3 VT1.3 VT2.2 | length 4.7
  Top Layer w0.5: VT1.3 93.1,108.4 93.575,107.925 v2(94.9,107.925)
  Bottom Layer w0.5: v2(94.9,107.925) R10.2 ; VT2.2@100.62,111.55 VT2.2
NetR11_2: R11.2 VT2.1 | length 2
  Bottom Layer w0.5: R11.2 100.713,107.463 VT2.1
NetR13_1: R13.1 VD5.1 VT1.1 VT2.3 | length 13.3
  Top Layer w0.5: R13.1@101.8,105.75 R13.1 101.825,106.775 v2(102.35,107.3)
  Bottom Layer w0.5: v2(102.35,107.3) 104.7,109.65 104.7,110.85 104.7,114.2 104.025,114.875 VD5.1 VD5.1@103.012,114.85 ; VT2.3 104.65,110.441
  other v1: 94,114.95 92.2,114.975 93.05,115.35
NetXP3_8: XP3.8
PWRMON: DD1.40 XP3.6 | length 48.9
  Top Layer w0.2: v1(104.755,69.303) 104.908,69.303 107.011,67.2 110.107,67.2 110.907,68 111.55,68 113.1,69.55 DD1.40
  Bottom Layer w0.2: XP3.6 101.3,98.201 101.3,94.464 100.025,93.189 100.025,70.1 100.85,69.275 104.727,69.275 v1(104.755,69.303)
RESET: DD1.44 XP3.7 | length 46.8
  Top Layer w0.2: v1(104.6,68) 105.575,68 106.825,66.75 110.293,66.75 111.093,67.55 DD1.44
  Bottom Layer w0.2: XP3.7 97.524,95.237 99.125,93.636 99.125,69.411 100.536,68 v1(104.6,68)
RXD: DD1.85 XP3.10 | length 91.7
  Top Layer w0.2: v1(104.325,67) 104.28,66.955 104.28,64.739 112.294,56.725 119.203,56.725 v1(119.406,56.928) ; v1(124.3,54.275) 124.3,54.25 124.6,53.95 127.375,53.95 136.375,62.95 136.375,68.325 135.3,69.4 133.25,69.4 132.9,69.05 DD1.85
  Bottom Layer w0.2: XP3.10 96.25,98.171 96.25,95.875 98.675,93.45 98.675,69.225 100.9,67 v1(104.325,67) ; v1(119.406,56.928) 119.406,56.869 122,54.275 v1(124.3,54.275)
RXD0: DD1.99 XP2.2 | length 60.5
  Top Layer w0.2: v1(123.075,52.925) 127.975,52.925 137.275,62.225 137.275,74.65 135.875,76.05 DD1.99
  Bottom Layer w0.2: XP2.2 103.925,56.218 103.925,53.4 104.4,52.925 v1(123.075,52.925)
SCK: DA1.12 DD1.62 DD3.6 | length 61.7
  Top Layer w0.2: v1(101.625,73.925) 101.625,79.275 103.575,81.225 106.45,81.225 108.685,83.46 DD3.6 ; DA1.12 103.264,73.075 v1(102.214,72.025) 101.9,71.711 101.9,64.574 111.636,54.838 121.19,54.838 123.55,57.198 DD1.62
  Bottom Layer w0.2: v1(101.625,73.925) 101.625,72.614 v1(102.214,72.025)
SS0: DA1.10 DD1.63 | length 47.7
  Top Layer w0.2: DA1.10 105.35,75 105.15,75.2 104.225,75.2 101.425,72.4 101.425,64.412 111.45,54.388 121.376,54.388 124.05,57.061 DD1.63
SS1: DD1.59 DD3.1 | length 54.2
  Top Layer w0.2: v1(100.75,70.425) 100.225,70.95 100.225,84.325 101.9,86 DD3.1 ; v1(104.175,69.925) 103.5,69.25 103.5,64.883 112.108,56.275 119.975,56.275 122.05,58.35 DD1.59
  Bottom Layer w0.2: v1(100.75,70.425) 101.25,69.925 v1(104.175,69.925)
STAT_LED: DD1.66 XP2.9 | length 40.6
  Top Layer w0.2: XP2.9 96.262,56.175 98.35,56.175 98.775,55.75 98.775,53.8 99.2,53.375 121.7,53.375 125.55,57.225 DD1.66
TXD: DD1.82 XP3.9 | length 85.9
  Top Layer w0.2: v1(104.93,66.303) 104.93,64.726 112.481,57.175 118.55,57.175 119.05,57.675 v1(120,57.675) ; v1(124.906,54.878) 124.947,54.878 125.425,54.4 126.9,54.4 135.925,63.425 135.925,66.5 134.875,67.55 DD1.82
  Bottom Layer w0.2: XP3.9 94.984,95.966 98.225,92.725 98.225,68.375 100.325,66.275 v1@104.735,66.275 ; v1(120,57.675) 122.75,54.925 124.859,54.925 v1(124.906,54.878)
TXD0: DD1.98 XP2.1 | length 53.3
  Top Layer w0.2: v1(123.731,53.578) 123.747,53.578 123.825,53.5 127.825,53.5 136.825,62.5 136.825,74.15 135.425,75.55 DD1.98
  Bottom Layer w0.2: XP2.1 106.463,53.578 v1(123.731,53.578)
V_SD: C44.1 C45.1 C50.1 DA4.4 L7.2 R14.2 R19.1 R20.1 R21.1 VD8.2 XP2.10 | length 125.4
  Top Layer w0.25: DA4.4@127.425,98.225 127.425,98.875 127.675,99.125 128.075,99.125 128.6,99.65 C50.1@129.299,99.65
  Top Layer w0.5: XP2.10 98.547,61 103.75,61 109.25,55.5 v3(109.25,55.05) ; R14.2 119.924,101.474 120.3,101.85 R20.1 R21.1 R19.1 126.575,101.85 126.675,101.95 ; 129.299,101.85 132.475,101.85 134.725,99.6 144.1,99.6 146.075,97.625 146.075,72.55 140.2,66.675 140.2,62.675 v3(131.2,53.675)
  Top Layer w0.9: C50.1@129.299,99.65 129.299,101.85
  Bottom Layer w0.5: v3(109.25,55.05) 115.95,55.05 119.375,58.475 120.331,58.475 120.356,58.45 120.95,58.45 123.35,56.05 125.55,56.05 127.925,53.675 v3(131.2,53.675)
V_SYSTEM: C23.1 DD1.6 R4.1 R7.2 | length 11.4
  Top Layer w0.2: DD1.6 127.55,79.75 127.825,80.025 130.35,80.025 131.025,80.7 v1(131.025,81.5)
  Bottom Layer w0.5: R4.1 R7.2 130.199,83 C23.1 130.2,82 130.7,81.5 v1(131.025,81.5)
V_VIN: C22.1 DD1.7 R5.1 R6.1 VD2.3 | length 31.2
  Top Layer w0.2: v1(126.375,81.475) 126.375,80.425 127.05,79.75 DD1.7
  Bottom Layer w0.5: v1(126.375,81.475) 126.9,81.475 127.95,80.425 131.35,80.425 132.2,81.275 132.2,83.125 134.275,85.2 134.275,88.75 134.7,89.175 135.725,89.175 137.65,91.1 R6.1 141.715,91.1 144.276,91.099 R5.1 144.3,89.353 C22.1@144.302,89.351
VCC: C38.2 C39.1 C51.1 DA2.1 DA2.3 DA4.15 DA4.16 DA4.17 R4.2 XP3.1 XP3.2 | length 11
  Top Layer w0.25: DA4.15 126.425,93.7 126.725,93.4 ; 126.925,93.225 DA4.16 ; 127.35,93.75 127.425,93.825 DA4.17
  Top Layer w0.5: v1(123.875,86.4) 123.875,87.425 124,87.55 ; 126.8,92.85 126.825,92.875 C51.1
  Bottom Layer w0.5: v1(123.875,86.4) 123.875,85.55 124.875,84.55 R4.2
VIN: C32.2 C33.2 FU3.1 X2.1 X10.1 | length 0
  Top Layer w0.5: C32.2@100.197,90.497 C32.2@100.2,90.5
VIN_F: C41.2 C42.2 C43.2 DA3.2 R5.2 VT1.2 | length 48.6
  Top Layer w0.25: 110.4,103.65 110.425,103.625 DA3.2
  Top Layer w0.5: C41.2@106.925,102.725 C42.2@106.925,104.775
  Bottom Layer w0.5: v1(108.75,104.875) 108.75,101.125 111.8,98.075 120.95,98.075 121.925,99.05 137.375,99.05 138.975,97.45 141.925,97.45 144.3,95.075 R5.2
pads on no net: DA1.5 DA1.6 DA1.11 DA3.3 DA3.6 DA4.2 DA4.3 DA4.18 DD1.1 DD1.2 DD1.3 DD1.4 DD1.5 DD1.8 DD1.9 DD1.13 DD1.14 DD1.19 DD1.20 DD1.21 DD1.24 DD1.25 DD1.26 DD1.27 DD1.29 DD1.30 DD1.32 DD1.33 DD1.34 DD1.35 DD1.36 DD1.37 DD1.38 DD1.43 DD1.50 DD1.51 DD1.52 DD1.56 DD1.57 DD1.58 DD1.65 DD1.68 DD1.69 DD1.70 DD1.73 DD1.74 DD1.75 DD1.76 DD1.77 DD1.78 DD1.79 DD1.80 DD1.81 DD1.86 DD1.87 DD1.88 DD1.89 DD1.90 DD1.91 DD1.92 DD1.93 DD1.94 DD1.95 DD1.100 DD3.3 REPER1.1 REPER2.1 REPER3.1 REPER4.1 VD5.2 VD6.2 XP1.3

## Polygon pours and split planes (outlines as drawn)
NetR13_1 on Top Layer "NETR13_1_L01_P046" (hatched 90Degree grid 0.15 track 0.2, remove dead copper, pour order 46): 91.55,116.197 91.55,113.25 91.55,112.95 92.3,112.2 94.625,112.2 94.625,116.2
VIN_F on Top Layer "VIN_F_L01_P042" (hatched 90Degree grid 0.15 track 0.2, remove dead copper, pour order 42): 95.525,109.275 95.525,116.197 109.325,116.197 109.325,110.35 110.725,108.95 110.775,108.9 110.775,104.25 110.775,103.35 110.5,103.075 109.65,103.075 109.6,103.075 109.2,103.475 108.075,103.475 108.05,103.475 107.725,103.15 107.725,101.825 106.45,101.825 106.275,102 106.2,102.075 106.2,103.45 105.975,103.45 105.6,103.825 105.475,103.95 105.475,105.55 105.475,105.775 105.25,106 105.1,106.15 103.65,106.15 103.425,106.15 103.25,106.325 103.25,107.5 103.25,107.85 103.025,108.075 98.025,108.075 95.675,108.075 95.525,108.225
GND on Top Layer "GND_L01_P052" (hatched 90Degree grid 0.15 track 0.2, remove dead copper, pour order 52): 72.644,116.197 147.644,116.197 147.644,52.197 72.644,52.197
+3V on Top Layer "+3V_L01_P032" (hatched 90Degree grid 0.15 track 0.2, remove dead copper, pour order 32): 131.875,91.05 131.875,91.725 132.125,92.275 132.375,92.525 132.375,93.05 132.375,93.5 134.1,93.5 134.2,93.5 134.575,93.125 134.675,93.025 136.125,93.025 136.675,93.025 136.975,92.725 136.975,90.45 136.975,85.625 135.125,85.625 135.125,89.9 134.85,90.175 133.275,90.175 131.875,90.175
VCC on Top Layer "VCC_L01_P030" (hatched 90Degree grid 0.15 track 0.2, remove dead copper, pour order 30): 126.25,93.75 129.525,93.75 129.525,91.825 130.725,91.825 130.725,90.5 128.725,90.5 128.725,89.425 130.7,89.425 130.7,88.475 128.975,88.475 128.975,87.15 126.375,87.15 124.75,87.15 120.075,87.15 112.175,87.15 110.45,88.875 105.575,93.75 103.9,95.425 103.9,100.1 103.9,101.325 107.3,101.325 107.3,95.8 109.275,93.825 111.725,91.375 112.675,90.425 115.9,90.425 119.575,90.425 122.25,90.425 124.175,90.425 126.05,92.3 126.25,92.5 126.25,93.5
V_SD on Top Layer "V_SD_L01_P028" (hatched 90Degree grid 0.15 track 0.2, remove dead copper, pour order 28): 124.375,111.25 124.375,115.5 124.375,116.197 128.375,116.2 128.375,113.85 129.475,112.75 131.875,112.75 131.875,106.125 130,106.125 129.9,106.125 129.9,105.725 129.9,103.925 129.9,101.625 127.325,101.625 126.4,101.625 126.05,101.975 124.375,103.65 124.375,107.025
NetC40_2 on Top Layer "NETC40_2_L01_P026" (hatched 90Degree grid 0.15 track 0.2, remove dead copper, pour order 26): 114.775,105.875 114.775,106.95 114.775,109.65 115.05,109.925 116.35,109.925 118.125,109.925 118.325,110.125 118.325,112.6 118.325,116.197 122,116.197 122,106.05 122,105.175 122,104.9 122,104.275 122,103.8 118.9,103.8 117.875,103.8 117.5,103.8 117.5,104.625 114.975,104.625 114.775,104.825
NetC35_2 on Top Layer "NETC35_2_L01_P014" (hatched 90Degree grid 0.15 track 0.2, remove dead copper, pour order 14): 87.75,114.25 87.75,116.172 87.75,116.197 91.247,116.197 91.25,115.35 91.25,114.225 90.85,113.825 90.625,113.6 90.625,110.45 90.625,109.075 90.35,109.075 89.775,109.075 87.75,109.075
NetC34_2 on Top Layer "NETC34_2_L01_P004" (hatched 90Degree grid 0.15 track 0.2, remove dead copper, pour order 4): 80.125,103.1 80.125,106.5 80.625,107 81.375,107 82.825,108.45 83.125,108.75 83.125,111.05 83.125,114.625 83.125,116.197 86.15,116.197 86.15,103.1
VIN on Top Layer "VIN_L01_P034" (hatched 90Degree grid 0.15 track 0.2, remove dead copper, pour order 34): 95.2,94.3 100.475,94.3 100.575,94.3 101.025,93.85 101.025,89.5 98.95,89.5 98.05,90.4 90.3,90.4 89.4,89.5 83.075,89.5 79.55,93.025 73.5,99.075 73.5,105.65 73.5,106.625 78.825,106.625 78.825,101.875 78.825,100.85 78.825,99.65 84.175,94.3 87.45,94.3 91.25,94.3
NetR10_2 on Top Layer "NETR10_2_L01_P036" (hatched 90Degree grid 0.15 track 0.2, remove dead copper, pour order 36): 87.075,108.425 87.075,103.025 91.975,103.025 92.775,103.825 93,104.05 93,106.325 93,106.725 94.45,108.175 94.45,109.275 94.45,110.525 94.45,111.025 94.425,111.225 92.5,111.225 91.8,111.225 91.325,110.75 91.325,109.075 91.325,108.525 91.225,108.425
NetR13_1 on Bottom Layer "NETR13_1_L02_P048" (hatched 90Degree grid 0.15 track 0.2, remove dead copper, pour order 48): 103.5,114.45 102.375,114.45 101.5,114.45 101.15,114.8 100.975,114.975 99.55,114.975 95.475,114.975 94.9,114.4 94.575,114.075 94.575,113.45 94.575,113.25 94.275,112.95 94.175,112.85 91.825,112.85 91.725,112.85 91.6,112.975 91.5,113.075 91.5,116.2 103.497,116.2 103.5,116.197
NetC34_2 on Bottom Layer "NETC34_2_L02_P044" (hatched 90Degree grid 0.15 track 0.2, remove dead copper, pour order 44): 82.75,109.5 82.134,108.6 81.5,107.825 81.1,107.225 81.1,106.875 80.425,106.2 80.2,105.975 80.2,104.95 80.2,103.95 80.925,103.225 83,103.225 83.225,103.225 83.425,103.425 83.8,103.8 83.8,105.3 83.8,106.725 84.15,107.075 84.175,107.1 86.3,107.1 86.3,109.475 86.25,109.525 85.75,110.025 83.05,110.025 82.75,109.725
NetR10_2 on Bottom Layer "NETR10_2_L02_P038" (hatched 90Degree grid 0.15 track 0.2, remove dead copper, pour order 38): 101.125,114.425 95.225,114.425 95.1,114.425 94.45,113.775 94.15,113.475 94.15,109.475 94.15,108.675 94.25,108.575 94.35,108.475 95.35,108.475 95.625,108.475 95.75,108.6 95.95,108.8 95.95,110.6 95.95,110.9 96.075,111.025 99.775,111.025 101.225,111.025 101.45,111.2 101.45,111.625 101.45,114.425
GND on Bottom Layer "GND_L02_P050" (hatched 90Degree grid 0.15 track 0.2, remove dead copper, pour order 50): 72.644,116.197 147.644,116.197 147.644,52.197 72.644,52.197
NetC35_2 on Bottom Layer "NETC35_2_L02_P020" (hatched 90Degree grid 0.15 track 0.2, remove dead copper, pour order 20): 89.425,111.35 87.625,111.35 87.625,111.75 87.625,116.197 91.2,116.197 91.2,111.35
NetR10_2 on Bottom Layer "NETR10_2_L02_P010" (hatched 90Degree grid 0.15 track 0.2, remove dead copper, pour order 10): 87.625,110.375 91.725,110.375 91.725,106.9 91.725,104.775 91.725,103.35 87.625,103.35

## Keep-outs
Keep-Out Layer:
  the board outline again, w0.2

## Other copper
Top Layer:
  rectangle net H-: 90.464,69.325 97.464,71.825
  rectangle net H+: 90.464,72.325 97.464,74.825
  rectangle net M-: 90.464,75.325 97.464,77.825
  rectangle net M+: 90.464,78.325 97.464,80.825
  rectangle net CANL: 90.464,81.325 97.464,83.825
  rectangle net CANH: 90.464,84.3 97.464,86.8
  rectangle net NetC52_1: 125.675,99.825 128.125,101.275
  rectangle net NetC52_1: 126.3,99.25 127.175,100.2
  pour cut-out: 86.399,103.049 86.424,103.024 86.424,102.75 86.719,102.75 86.874,102.659 86.874,102.905 86.874,103.049
  pour cut-out: 86.162,115.662 86.212,115.612 87,115.747 87.738,115.612 87.738,109.012 87.713,108.987 87.663,109.037 86.85,108.815 86.138,109.037
  pour cut-out: 104.35,75.075 107.425,75.075 108.05,74.45 108.05,71.3 104.502,71.3 104.325,71.477 104.325,75.05
  pour cut-out: 128.2,94.813 128.6,94.813 128.6,95.187 128.566,95.221 128.187,95.221
Bottom Layer:
  rectangle net NetC52_1: 125.675,99.825 128.2,101.275
  rectangle net +3V: 135.025,85.525 137.075,88.325
  pour cut-out: 85.95,106.65 87.375,106.65 87.688,106.963 87.688,108.875 86.279,108.875 86.25,108.904 86.075,108.73 86.075,107
  pour cut-out: 121.862,114.575 123.2,114.875 124.487,114.575 124.487,114.375 124.487,106.1 123.2,105.8 122.006,106.056 121.862,106.2
  pour cut-out: 86.137,115.55 86.187,115.5 86.975,115.612 87.712,115.5 87.712,108.9 87.688,108.875 87.638,108.925 86.85,108.815 86.112,108.925
  pour cut-out: 90.325,83.5 93.2,83.5 93.2,80.55 90.325,80.55
  pour cut-out: 90.35,87.05 93.225,87.05 93.225,84.1 90.35,84.1

## Silkscreen, mask and mechanical layers (free items; w line width, h text height)
Top Overlay:
  lines w0.2: 103.45,113.45 104.7,113.45 ; 104.05,112.85 104.05,114.1 ; 119.225,94.225 119.6,94.6 119.6,94.625 119.6,95.675 120,96.075 120.125,96.075 ; 119.225,95.9 119.375,95.9 119.425,95.95 119.425,96.625 ; 119.275,92.725 119.4,92.85 119.4,93.8 120,94.4 120.075,94.4 ; 119.425,91.35 119.675,91.6 119.675,92.775 119.775,92.875 119.825,92.875 ; 127.95,112.675 128.925,112.675 ; 128.463,112.163 128.463,113.138
  text "BATTERY" at 138.45,100.05 h1
  text "+VIN" at 83.4,90.975 h1.5
  text "GND" at 83.4,87.925 h1.5
  text "CANH" at 83.4,84.975 h1.5
  text "CANL" at 83.4,81.9 h1.5
  text "MIC+" at 83.4,79.075 h1.5
  text "MIC-" at 83.4,75.975 h1.5
  text "EAR+" at 83.4,73.025 h1.5
  text "EAR-" at 83.4,69.85 h1.5
Mechanical 2:
  text "TOP" at 104.675,45.575 h4
Mechanical 3:
  text "BOT" at 115.325,45.575 h4
  text "TOP" at 1042.85,0 h4
  text "TOP" at 1068.1,0 h4